# Altium PCB linkit-v4-1.1_6layers_smdonly.PcbDoc (part 5 of 5)
Units mm, origin at the board's own origin, x right, y up, seen from the top; angles counter-clockwise.
Board outline 70 x 35 mm, 6 copper layers (Top Layer, Int1 (GND), Int2 (Sign), Int3 (Sign), Int4 (PWR), Bottom Layer), stack 1.649 mm thick; 203 components, 154 nets, 694 pads, 939 vias.
Unrouted connection lines stored in the file: 1.
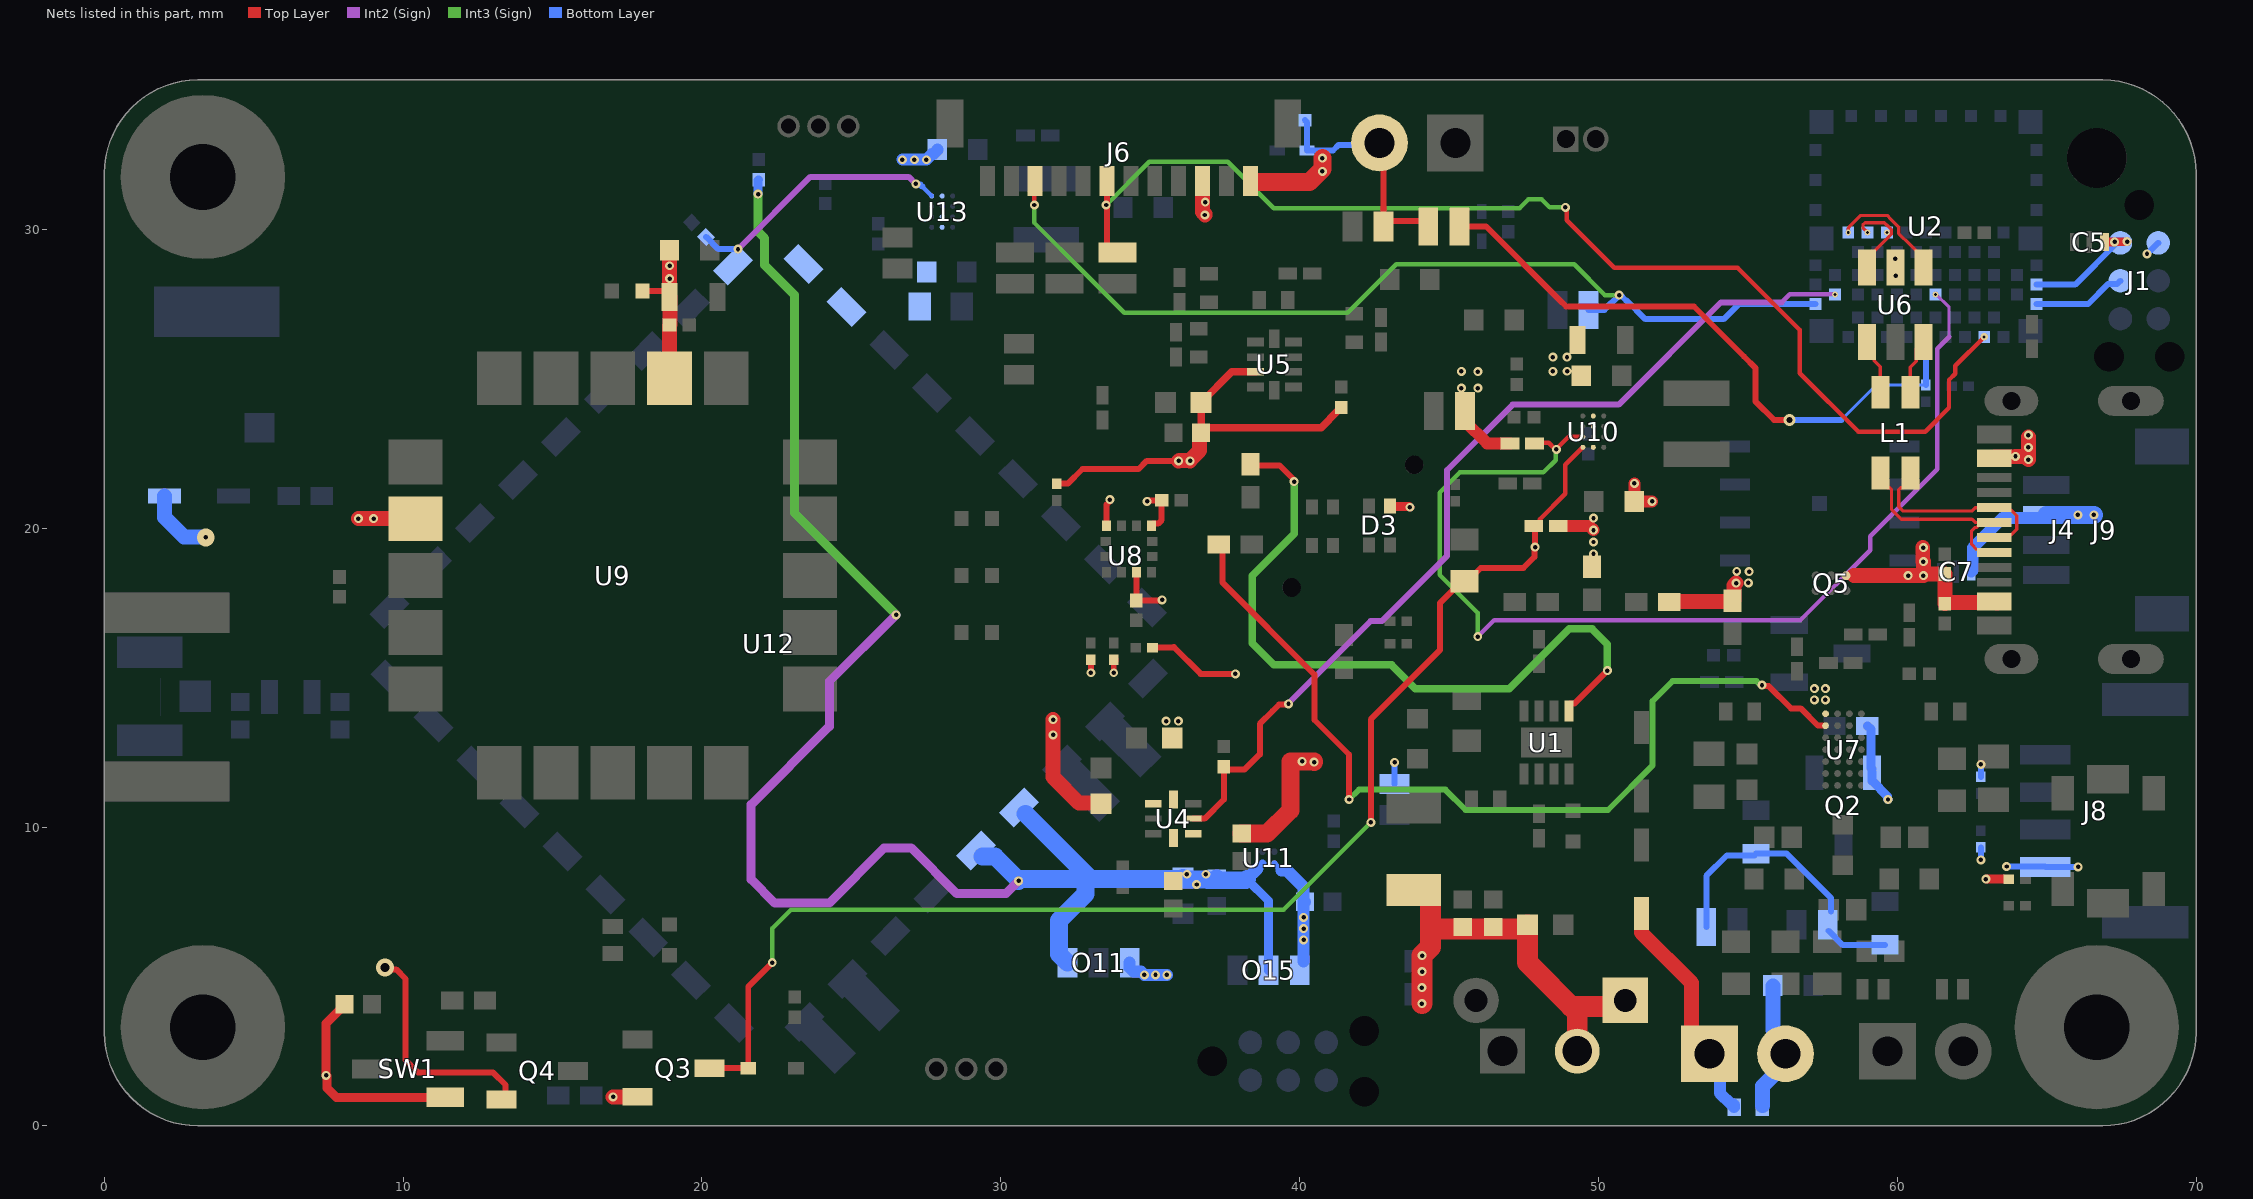
[diagram p8: the nets of this part, all layers, seen from the top]

## Via types
v1: diameter 0.3, hole 0.127, Int1 (GND) to Int3 (Sign), tented both sides, 148 vias
v2: diameter 0.4, hole 0.2, Int1 (GND) to Int2 (Sign), tented both sides, 103 vias
v3: diameter 0.3, hole 0.15, Top Layer to Int1 (GND), tented both sides, 99 vias
v4: diameter 0.4, hole 0.2, Int1 (GND) to Bottom Layer, tented both sides, 69 vias
v5: diameter 0.4, hole 0.2, Int1 (GND) to Int3 (Sign), tented both sides, 68 vias
v6: diameter 0.4, hole 0.2, Top Layer to Int1 (GND), tented both sides, 64 vias
v7: diameter 0.3, hole 0.15, Top Layer to Int4 (PWR), tented both sides, 63 vias
v8: diameter 0.3, hole 0.15, Top Layer to Int3 (Sign), tented both sides, 56 vias
v9: diameter 0.3, hole 0.15, Int1 (GND) to Bottom Layer, tented both sides, 46 vias
v10: diameter 0.4, hole 0.2, Top Layer to Bottom Layer, tented both sides, 34 vias
v11: diameter 0.3, hole 0.15, Int4 (PWR) to Bottom Layer, tented both sides, 18 vias
v12: diameter 0.3, hole 0.15, Top Layer to Int2 (Sign), tented both sides, 18 vias
v13: diameter 0.3, hole 0.15, Int3 (Sign) to Bottom Layer, tented both sides, 18 vias
v14: diameter 0.3, hole 0.15, Int2 (Sign) to Bottom Layer, tented both sides, 16 vias
v15: diameter 0.3, hole 0.15, Int1 (GND) to Int2 (Sign), tented both sides, 14 vias
v16: diameter 0.2, hole 0.1, Int3 (Sign) to Bottom Layer, tented both sides, 14 vias
v17: diameter 0.5, hole 0.2, Top Layer to Bottom Layer, tented both sides, 12 vias
v18: diameter 0.2, hole 0.1, Int2 (Sign) to Bottom Layer, tented both sides, 10 vias
v19: diameter 0.3, hole 0.15, Int2 (Sign) to Int3 (Sign), tented both sides, 9 vias
v20: diameter 0.6, hole 0.15, Int1 (GND) to Bottom Layer, tented both sides, 8 vias
v21: diameter 0.3, hole 0.15, Int1 (GND) to Int3 (Sign), tented both sides, 8 vias
v22: diameter 0.226, hole 0.1, Top Layer to Int3 (Sign), tented both sides, 6 vias
v23: diameter 0.3, hole 0.15, Top Layer to Bottom Layer, tented both sides, 5 vias
v24: diameter 0.25, hole 0.1, Int3 (Sign) to Bottom Layer, tented both sides, 5 vias
v25: diameter 0.25, hole 0.1, Int2 (Sign) to Bottom Layer, tented both sides, 5 vias
v26: diameter 0.25, hole 0.1, Top Layer to Bottom Layer, tented both sides, 5 vias
v27: diameter 0.2, hole 0.1, Top Layer to Bottom Layer, tented both sides, 3 vias
v28: diameter 0.6, hole 0.3, Top Layer to Bottom Layer, tented both sides, 3 vias
v29: diameter 0.6, hole 0.15, Int3 (Sign) to Bottom Layer, tented both sides, 2 vias
v30: diameter 0.25, hole 0.1, Int1 (GND) to Bottom Layer, tented both sides, 2 vias
v31: diameter 0.2, hole 0.1, Int1 (GND) to Bottom Layer, tented both sides, 2 vias
v32: diameter 0.4, hole 0.2, Int2 (Sign) to Bottom Layer, tented both sides, 1 vias
v33: diameter 0.4, hole 0.2, Top Layer to Int2 (Sign), tented both sides, 1 vias
v34: diameter 0.169, hole 0.1, Int3 (Sign) to Bottom Layer, tented both sides, 1 vias
v35: diameter 0.6, hole 0.15, Int4 (PWR) to Bottom Layer, tented both sides, 1 vias
v36: diameter 0.25, hole 0.1, Int2 (Sign) to Int3 (Sign), tented both sides, 1 vias
v37: diameter 0.169, hole 0.1, Top Layer to Int2 (Sign), tented both sides, 1 vias

## Nets (pads, with @x,y where several pads share a name; then routed paths per layer and width w, separated by ;. In a path a pad name is that pad's centre, name@x,y a point inside that pad or via, vN(x,y) a via of type N, cw(c..) or ccw(c..) an arc to the next point about the centre after c; other vN are vias at no path point) (continued)
SPI_MOSI: J6.7 O3.2 U2.34 | length 39.7
  Top Layer w0.15: v8(48.895,30.734) 48.938,30.691 48.938,30.309 50.527,28.72 54.656,28.72 56.742,26.634 56.742,25.745 56.742,25.189 58.702,23.229 60.933,23.229 61.731,24.027 61.731,24.96 61.942,25.171 61.942,25.431 v26(62.91,26.399)
  Top Layer w0.2: J6.7@33.554,31.623 33.554,30.815 33.554,29.453 33.784,29.223 O3.2@33.909,29.223
  Int3 (Sign) w0.15: v8(33.528,30.815) 34.97,32.257 37.593,32.257 39.139,30.711 47.362,30.711 47.66,31.009 48.098,31.009 48.373,30.734 v8(48.895,30.734)
SPI_NSS: J6.10 O1.2 U2.2 | length 31.7
  Top Layer w0.15: v8(31.128,30.815) 31.128,31.597 J6.10@31.154,31.623
  Int3 (Sign) w0.15: v8(31.128,30.815) 31.128,30.213 32.824,28.517 34.136,27.205 41.613,27.205 43.237,28.829 48.706,28.829 49.188,28.829 50.22,27.797 v13(50.694,27.797)
  Bottom Layer w0.2: O1.2@49.67,27.305 50.202,27.305 v13(50.694,27.797) ; v13@50.691,27.797 50.72,27.826 50.924,27.621 50.946,27.621 51.572,26.995 54.192,26.995 54.696,27.499 U2.2@57.26,27.499
SPV+: C56.1 D5.2 J15.1 | length 7.8
  Top Layer w0.5: D5.2@51.435,7.105 51.435,6.465 53.113,4.787 53.113,3.021 J15.1@53.721,2.413
  Bottom Layer w0.4: J15.1@53.721,2.413 54.067,2.067 54.067,1.097 54.439,0.725 54.514,0.725 54.539,0.7 C56.1@54.539,0.625
SPV-: C56.2 FB5.1 J15.2 | length 4.2
  Bottom Layer w0.5: C56.2@55.489,0.675 55.489,1.33 J15.2@56.261,2.101 ; FB5.1@55.84,4.674 55.84,3.213 56.261,2.792 J15.2@56.261,2.413
STAT_LED: R13.2 U1.5 | length 24.1
  Top Layer w0.2: R13.2@38.354,22.14 38.396,22.098 39.335,22.098 39.819,21.613 v8(39.819,21.559) ; U1.5@49.01,13.877 49.01,14.077 49.06,14.127 49.193,14.127 v8(50.298,15.232)
  Int3 (Sign) w0.254: v8(39.819,21.559) 39.819,19.819 38.413,18.413 38.413,16.151 39.139,15.425 43.075,15.425 43.868,14.632 47.017,14.632 49.022,16.637 49.784,16.637 50.298,16.123 v8(50.298,15.232)
SWDCLK: J1.4 U2.30 | length 3.1
  Bottom Layer w0.2: U2.30@64.66,27.499 66.383,27.499 67.048,28.164 67.354,28.164 J1.4@67.466,28.276
SWDIO: J1.2 U2.28 | length 3.4
  Bottom Layer w0.2: U2.28@64.66,28.149 65.953,28.149 67.351,29.546 J1.2@67.466,29.546
SWS: C3.2 O6.2 U2.40 | length 21
  Top Layer w0.2: O6.2@45.352,30.099 46.241,30.099 48.706,27.634 48.92,27.419 53.198,27.419 54.872,25.745 55.254,25.363 55.254,24.248 55.88,23.622 v10(56.388,23.622)
  Bottom Layer w0.1: 58.13,23.622 59.297,24.789 60.39,24.789 60.392,24.791 C3.2@60.96,24.791
  Bottom Layer w0.2: v10@56.416,23.622 58.13,23.622 ; C3.2@60.96,24.791 U2.40@60.96,26.399
SWS_IN: D8.1 J10.2 O6.1 O8.1 R60.1 | length 8.1
  Top Layer w0.2: J10.2@42.672,32.893 42.812,32.753 O8.1@42.812,30.281 ; O8.1@42.812,30.099 O8.1@42.812,30.243 ; O6.1@44.31,30.099 44.128,30.281 O8.1@42.812,30.281 ; O8.1@42.812,30.243 O8.1@42.812,30.281 ; O8.1@42.812,30.243 42.773,30.281 O8.1@42.812,30.281
  Bottom Layer w0.2: R60.1@40.177,33.655 40.251,33.581 D8.1@40.251,32.639 41.12,32.639 41.307,32.826 42.605,32.826 J10.2@42.672,32.893
USB_D_N: U2.10 U6.6 | length 3
  Top Layer w0.112: U6.6@58.985,28.728 59.229,28.972 59.229,29.273 59.794,29.838 59.794,29.996 59.691,30.099 ; v27(59.01,29.899) 58.851,30.058 58.851,30.15 58.927,30.226 59.563,30.226 59.69,30.099
USB_D_P: U2.8 U6.4 | length 3.9
  Top Layer w0.112: v27(58.36,29.899) 58.36,30.047 58.777,30.465 59.662,30.465 59.789,30.338 60.054,30.073 60.054,29.859 60.427,29.486 60.885,29.028 U6.4@60.885,28.728
USB_L_N: L1.3 U6.1 | length 1.9
  Top Layer w0.112: U6.1@58.985,26.228 59.229,25.984 59.229,25.745 59.229,25.607 59.436,25.4 L1.3@59.436,24.548
USB_L_P: L1.2 U6.3 | length 1.5
  Top Layer w0.112: L1.2@60.436,24.871 60.436,25.384 60.641,25.589 60.641,25.745 60.641,25.984 U6.3@60.885,26.228
USB_N: J4.A7 J4.B7 L1.4 | length 6.7
  Top Layer w0.112: L1.4@59.436,21.848 59.436,21.598 59.68,21.354 59.744,21.354 59.809,21.288 59.809,20.625 60.134,20.301 62.503,20.301 62.612,20.191 62.76,20.191 J4.A7@63.243,20.191 ; J4.A7@62.76,20.135 62.76,20.133 62.724,20.097 62.722,20.097 62.648,20.023 62.593,20.023 62.486,19.916 62.486,19.466 62.667,19.285 63.149,19.285 J4.B7@63.243,19.191
USB_P: J4.A6 J4.B6 L1.1 | length 7.4
  Top Layer w0.112: L1.1@60.436,21.848 60.436,21.598 60.192,21.354 60.113,21.354 60.048,21.288 60.048,20.724 60.198,20.574 62.495,20.574 62.612,20.691 J4.B6@63.243,20.691 ; 62.605,20.684 J4.B6@63.236,20.684 ; J4.A6@63.243,19.691 63.337,19.785 63.819,19.785 64,19.966 64,20.416 63.819,20.597 63.337,20.597 J4.B6@63.25,20.684
VADC_EN: R57.2 U2.3 U4.2 | length 31.7
  Top Layer w0.2: U4.2@36.449,10.279 36.822,10.279 37.465,10.922 37.465,11.928 R57.2@37.465,12.02 37.557,11.928 38.165,11.928 38.67,12.433 38.67,13.456 39.095,13.881 39.316,14.102 39.537,14.102 39.54,14.105 39.61,14.105 v12(39.63,14.124)
  Int2 (Sign) w0.15: 56.134,27.559 56.399,27.824 v18(57.91,27.824)
  Int2 (Sign) w0.2: v12(39.63,14.124) 39.63,14.146 42.374,16.891 42.755,16.891 44.941,19.077 44.941,21.949 47.129,24.137 50.68,24.137 54.102,27.559 56.134,27.559
VBAT: C1.1 C19.2 C20.1 C21.1 C22.1 C41.2 C48.2 C51.1 J5.2 J6.3 O9.1 O11.3 Q2.2 Q3.2 R4.1 R8.2 R9.2 R55.2 SW1.1 U10.A2 U13.A2 | length 33.4
  Top Layer w0.3: C1.1@8.049,4.047 8.042,4.047 7.899,3.904 7.899,3.897 7.43,3.428 v7(7.43,1.687) 7.449,1.668 7.449,1.275 7.769,0.955 SW1.1@11.41,0.955
  Top Layer w0.4: O9.1@45.533,23.583 46.279,22.837 R9.2@47.064,22.837 ; R8.2@48.66,20.066 49.708,20.066 v7(49.835,19.939) ; C48.2@51.184,20.75 51.2,20.766 C48.2@51.2,20.9 ; v3(51.2,21.5) C48.2@51.2,20.9 ; v3(51.8,20.9) C48.2@51.2,20.9
  Top Layer w0.5: v7(17.031,0.971) Q3.2@17.968,0.971 ; J6.3@36.754,31.623 36.754,30.583 36.83,30.507 v7(36.83,30.48)
  Top Layer w0.7: C19.2@43.815,7.891 44.19,7.891 44.375,7.706 44.375,7.296 44.375,6.593 ; v7(44.095,4.094) 44.093,4.626 v7(44.096,4.629) ; v7@44.093,4.755 44.093,5.158 44.1,5.165 v7(44.1,5.7) 44.382,5.982 44.382,6.593 ; 44.524,6.593 47.487,6.593 C22.1@47.625,6.731 47.625,5.461 49.292,3.794 J5.2@49.292,2.501 ; 49.086,4 50.7,4 C51.1@50.9,4.2
  Bottom Layer w0.3: R4.1@59,13.388 59.123,13.265 59.123,11.973 Q2.2@59.156,11.94 ; Q2.2@59.156,11.821 59.156,11.546 59.68,11.022 59.68,10.932 v11(59.69,10.922)
  Bottom Layer w0.4: v11@26.709,32.332 v11@27.51,32.332 ; v11(27.51,32.329) 27.705,32.523 27.754,32.523 27.879,32.648 C41.2@27.879,32.673 ; O11.3@34.315,5.461 34.315,5.291 34.446,5.161 34.696,5.161 v11(34.804,5.053) v11(35.56,5.053)
  other v7: 44.098,5.165 49.835,19.137 49.835,19.538 49.835,20.34 45.413,24.684 45.965,24.684 45.417,25.248 45.965,25.236 36.844,30.909
  other v11: 35.179,5.051 26.709,32.329 27.11,32.329
VBAT_SENSE: O5.1 O7.1 R5.2 R6.2 | length 9.3
  Bottom Layer w0.2: O5.1@53.611,6.657 53.611,8.365 54.295,9.049 55.217,9.049 R6.2@55.275,9.107 56.298,9.107 57.785,7.62 O7.1@57.785,7.168 ; O7.1@57.702,6.53 58.181,6.051 R5.2@59.585,6.051
VBUS: C17.2 C18.2 J4.A4_B9 J4.B4_A9 Q5.A1 R35.1 R52.2 U2.12 U6.5 U7.G4 | length 11.5
  Top Layer w0.4: v3(59.936,29.017) 59.936,28.964 U6.5@59.944,28.956 ; J4.A4_B9@63.21,17.508 J4.A4_B9@63.243,17.541
  Top Layer w0.5: R52.2@52.366,17.526 52.387,17.547 R35.1@54.462,17.547 ; R35.1@54.483,17.568 R35.1@54.462,17.547 ; v7(54.61,18.161) 54.533,18.084 54.533,17.618 R35.1@54.462,17.547 ; 58.547,18.412 58.55,18.415 v7(60.364,18.415) ; v7@60.365,18.416 v7(60.871,18.415) ; v7@60.852,19.353 60.852,18.884 v7(60.871,18.884) v7@60.871,18.443 ; v7(60.871,18.415) 60.922,18.466 C18.2@61.595,18.466 C17.2@61.595,17.475 ; C17.2@61.628,17.508 J4.A4_B9@63.21,17.508 ; J4.B4_A9@63.243,22.341 63.293,22.391 63.942,22.391 v7(63.957,22.405) 64.281,22.405 v7(64.389,22.297) v7@64.389,23.047 ; J4.A4_B9@63.279,17.555 J4.A4_B9@63.342,17.491
  other v3: 59.944,28.448
  other v7: 57.224,14.258 57.595,14.258 57.224,14.629 57.595,14.629 55.015,18.171 54.629,18.554 55.04,18.548 60.871,19.353 64.389,22.706 64.389,23.114
  other v31: 59.66,29.899
VCC_SEL: R9.1 U2.52 U10.B3 | length 36.1
  Top Layer w0.15: R9.1@47.864,22.837 47.882,22.855 48.339,22.855 48.558,22.636 v8(48.596,22.636) 48.596,22.655 48.999,23.058 U10.B3@49.461,23.058
  Int2 (Sign) w0.1: v18@61.308,27.824 61.737,27.395 61.737,26.403
  Int2 (Sign) w0.15: v19(45.962,16.374) 46.515,16.928 56.762,16.928 59.097,19.262 59.097,19.727 61.341,21.971 61.341,25.745 61.341,26.006 61.737,26.403 ; v18(61.285,27.824) v18@61.308,27.824
  Int3 (Sign) w0.15: v19(45.962,16.374) 45.962,17.163 44.683,18.442 44.683,20.228 44.683,20.666 44.683,21.188 45.368,21.873 48.162,21.873 48.567,22.278 48.567,22.607 v8(48.596,22.636)
"VOUT_TPS63901 3V3&2V32": C50.2 C61.1 U12.7 U12.8 U13.C2 U13.D2
VPA_EN: R67.2 U12.9 U13.A3 | length 9
  Int2 (Sign) w0.2: v14(21.209,29.337) 23.63,31.758 26.919,31.758 v14(27.158,31.518)
  Bottom Layer w0.15: 27.379,31.431 U13.A3@27.691,31.119
  Bottom Layer w0.2: R67.2@20.143,29.747 20.553,29.337 v14(21.209,29.337) ; v14(27.158,31.518) 27.178,31.499 27.311,31.499 27.379,31.431
VSENS_1: C8.1 C12.2 C13.1 C37.2 C38.2 R28.1 R54.2 R56.2 U4.4 U5.8 U8.3 U8.7 U8.10 | length 21.7
  Top Layer w0.2: R54.2@31.877,21.489 32.245,21.489 32.737,21.981 34.618,21.981 34.887,22.251 v7(35.956,22.251) ; U8.10@33.54,20.079 33.54,20.786 33.655,20.901 v7(33.655,20.955) ; U8.3@34.54,18.529 34.54,17.586 C38.2@34.537,17.582 34.538,17.581 35.354,17.581 35.373,17.6 v7(35.4,17.6) ; v7(34.9,20.9) 34.919,20.919 35.362,20.919 C37.2@35.385,20.942 35.385,20.271 35.268,20.154 35.09,20.154 35.04,20.104 U8.7@35.04,20.079 ; R56.2@35.078,16.002 35.76,16.002 35.787,16.029 ; 35.791,16.025 36.69,15.126 v7(37.849,15.126) ; C12.2@36.703,23.189 C12.2@36.705,23.191 ; R28.1@41.282,23.924 41.292,23.924 41.402,24.034 R28.1@41.402,24.044
  Top Layer w0.25: C12.2@36.705,23.191 C12.2@36.705,23.193 ; U5.8@38.521,25.228 37.726,25.228 C13.1@36.705,24.207 C12.2@36.705,23.193 ; R28.1@41.282,23.924 40.726,23.368 36.88,23.368 C12.2@36.705,23.193
  Top Layer w0.5: v7(35.956,22.251) 35.975,22.27 v7@36.331,22.27 ; v7(36.339,22.251) 36.339,22.262 v7@36.331,22.27 ; C12.2@36.703,23.189 36.655,23.141 36.655,22.594 v7@36.331,22.27
  other v7: 35.536,13.544 35.944,13.544
VSENS_2: C10.1 C39.1 C52.2 C53.2 D4.2 R48.1 U4.5 U9.2 U9.17 | length 14.4
  Top Layer w0.2: R48.1@18.013,27.94 18.748,27.94 18.81,27.878 18.81,26.91 18.913,26.807 C39.1@18.933,26.807
  Top Layer w0.5: v7(8.509,20.32) 10.413,20.32 U9.2@10.418,20.315 ; C53.2@18.918,29.3 v7(18.918,28.782) v7(18.918,28.35) 18.918,27.94 C52.2@18.918,27.74 18.931,27.727 C39.1@18.931,26.809 ; U9.17@18.922,25.019 C39.1@18.922,26.774 ; v7(31.75,13.596) v7(31.75,13.081) 31.75,11.673 32.622,10.801 33.339,10.801 C10.1@33.361,10.779
  Bottom Layer w0.5: D4.2@2.023,21.074 2.023,20.36 2.671,19.712 3.38,19.712 v35(3.399,19.693)
  other v7: 9.017,20.32
VSYS: C5.1 C7.1 C9.2 C11.2 C42.2 C45.2 C55.1 D3.1 J1.1 J6.1 J8.4 J9.2 O14.1 O15.3 Q4.2 R1.2 R2.2 R16.2 R61.2 R62.1 U4.1 U4.8 U10.C2 U10.D2 U11.A2 | length 31.9
  Top Layer w0.2: v28(9.39,5.306) 9.459,5.238 9.77,5.238 10.091,4.917 10.091,2.197 10.496,1.792 13.009,1.792 13.428,1.373 13.428,0.903 Q4.2@13.441,0.89 ; v7(33.02,15.163) R1.2@33.02,15.595 ; R2.2@33.772,15.571 33.782,15.561 v7(33.782,15.163) ; v7(67.273,29.579) v7@67.279,29.585 ; v7@67.685,29.585 v7(67.691,29.591)
  Top Layer w0.252: R2.2@33.772,15.571 33.772,15.585 R2.2@33.782,15.595 ; R16.2@63.554,8.255 R16.2@63.728,8.255
  Top Layer w0.3: R2.2@33.772,15.572 R2.2@33.788,15.589 ; D3.1@43.022,20.742 43.043,20.721 43.668,20.721 v7(43.688,20.701) ; v7@63.007,8.255 R16.2@63.554,8.255 ; C5.1@66.929,29.576 66.929,29.579 v7(67.273,29.579) ; v7@67.279,29.585 v7@67.685,29.585
  Top Layer w0.6: C9.2@38.06,9.779 38.913,9.779 39.691,10.557 39.691,12.199 v7(40.087,12.199) 40.491,12.199 v7(40.491,12.175) ; J6.1@38.404,31.582 40.334,31.582 40.767,32.015 v7(40.767,32.385)
  Bottom Layer w0.2: U11.A2@39.154,8.775 39.161,8.775 39.39,8.546 ; 39.58,8.475 39.58,8.546 ; v11@40.132,6.196 v11(40.132,6.223) ; O14.1@43.18,11.443 43.182,11.444 v11(43.182,12.164) ; v11(62.8,8.9) R62.1@62.8,9.32 ; R61.2@62.8,11.68 v11(62.8,12.1) ; v11(63.66,8.68) 64.939,8.68 J8.4@64.952,8.666 v11(66.055,8.666) ; v11(68.356,29.18) 68.363,29.18 68.729,29.546 J1.1@68.736,29.546
  Bottom Layer w0.4: 39.39,8.546 39.58,8.546 40.132,7.994 40.132,7.541 C45.2@40.18,7.493 40.132,7.445 v11(40.132,6.979) v11(40.132,6.604) v11(40.132,6.223) ; O15.3@40.132,5.5 v11@40.132,6.196 ; C7.1@62.476,18.542 62.526,18.592 62.526,19.346 63.519,20.339 64.887,20.339 J9.2@64.987,20.439
  Bottom Layer w0.6: J9.2@64.987,20.439 v11@66.579,20.439
  other v7: 36.558,8.077 62.962,8.255 36.227,8.421 36.862,8.421 48.477,25.248 48.952,25.251 48.473,25.724 48.949,25.727 40.767,31.943
  other v11: 66.04,20.447 66.579,20.442
VSYS_EN: C44.1 D1.1 Q3.3 R8.1 U10.A3 | length 44.4
  Top Layer w0.15: R8.1@47.86,20.066 47.885,20.066 48.035,20.216 48.035,20.292 48.895,21.152 48.895,22.124 U10.A3@49.478,22.707
  Top Layer w0.2: Q3.3@20.1,1.93 D1.1@21.552,1.93 21.552,4.662 v8(22.355,5.465) ; v8(42.383,10.155) 42.383,13.606 44.696,15.919 44.696,17.492 45.427,18.223 45.617,18.223 46.063,18.669 47.49,18.669 47.862,19.04 47.862,19.351 v12(47.881,19.37) 47.87,19.381 47.87,20.056 R8.1@47.86,20.066
  Int3 (Sign) w0.15: v8(22.355,5.465) 22.355,6.607 22.987,7.239 39.467,7.239 v8(42.383,10.155)
VSYS_SMD: C46.1 C59.2 O11.1 O15.2 R66.2 U11.A1 U12.31 U12.32 | length 57.8
  Int2 (Sign) w0.3: v19(26.5,17.1) 24.27,14.87 24.27,13.37 21.649,10.749 21.649,8.251 22.443,7.457 24.257,7.457 26.1,9.3 27,9.3 28.53,7.77 30.17,7.77 v14(30.6,8.2)
  Int3 (Sign) w0.3: v13(21.88,31.181) 21.88,29.92 22.1,29.7 22.1,28.8 23.1,27.8 23.1,20.5 v19(26.5,17.1)
  Bottom Layer w0.264: 38.591,8.612 U11.A1@38.754,8.775
  Bottom Layer w0.3: v13(21.88,31.181) 21.88,31.64 R66.2@21.9,31.66 ; 38.234,8.255 38.964,7.525 O15.2@38.964,5.207
  Bottom Layer w0.4: 38.234,8.255 38.591,8.612
  Bottom Layer w0.6: U12.31@29.391,9.009 29.816,9.009 v14@30.569,8.255 ; v14(30.6,8.2) 30.6,8.224 v14@30.569,8.255 ; U12.32@30.828,10.445 32.837,8.437 33.019,8.255 36.057,8.255 C46.1@36.1,8.298 36.15,8.248 36.894,8.248 36.921,8.22 37.163,8.22 37.219,8.276 C59.2@37.229,8.276 37.285,8.22 38.199,8.22 38.234,8.255 ; O11.1@32.233,5.461 31.95,5.744 31.95,6.869 32.837,7.756 32.837,8.255 v14@30.569,8.255
WIRELESS_NCHG_LED: R14.1 U7.F4 | length 30.4
  Top Layer w0.2: R14.1@37.296,19.457 37.414,19.339 37.414,18.186 40.5,15.1 40.5,13.582 41.656,12.426 v8(41.656,10.922) ; v8(55.474,14.751) 55.512,14.713 55.7,14.713 56.443,13.97 56.769,13.97 57.347,13.392 U7.F4@57.601,13.392
  Int3 (Sign) w0.2: v8(41.656,10.922) 41.987,11.253 44.877,11.253 45.559,10.572 50.323,10.572 51.816,12.065 51.816,14.219 52.482,14.885 55.286,14.885 55.419,14.751 v8(55.474,14.751)
pads on no net: J1.H1 J1.H2 J1.H3 J4.A8 J4.B8 J9.S1 J9.S2 J12.H1 J12.H2 J12.H3 MEC1.1 MEC1.2 MH1.0 Q5.B1 Q5.B2 U2.15 U2.41 U2.59 U2.65 U2.66 U2.67 U2.68 U2.69 U2.70 U2.71 U2.72 U2.73 U2.74 U2.75 U2.76 U2.77 U2.78 U8. U8.4 U8.11 U12.11 U12.12

## Polygon pours and split planes (outlines as drawn)
GND on Bottom Layer "Bottom Layer-GND" (solid, pour order 7): 9.64,16.115 9.807,16.004 10.655,15.155 10.767,14.988 10.806,14.791 10.767,14.594 10.655,14.427 9.807,13.578 9.64,13.467 9.445,13.428 9.403,13.411 9.349,13.388 9.264,13.371 9.179,13.354 9.128,13.354 9.078,13.344 7.51,13.344 7.444,13.3 7.247,13.261 6.677,13.261 6.48,13.3 6.313,13.412 6.201,13.579 6.162,13.776 6.162,14.926 6.201,15.123 6.313,15.29 6.48,15.402 6.677,15.441 7.247,15.441 7.444,15.402 7.611,15.29 7.63,15.262 8.337,15.262 9.079,16.004 9.246,16.115 9.443,16.155
GND on Bottom Layer "Bottom Layer-GND 1" (solid, pour order 8): 6.014,15.402 6.181,15.29 6.293,15.123 6.332,14.926 6.332,13.776 6.293,13.579 6.181,13.412 6.014,13.3 5.817,13.261 5.247,13.261 5.05,13.3 4.893,13.405 4.325,13.405 4.284,13.378 4.087,13.339 3.585,13.339 3.574,13.337 2.524,13.337 2.327,13.376 2.16,13.488 2.048,13.655 2.009,13.852 2.009,14.902 2.048,15.099 2.16,15.266 2.327,15.378 2.524,15.417 3.443,15.417 3.447,15.418 4.087,15.418 4.284,15.379 4.368,15.323 4.931,15.323 5.05,15.402 5.247,15.441 5.817,15.441
GND on Bottom Layer "BOTGND" (solid, remove dead copper, pour order 4): 0,33.113 0,1.778 1.905,-0.127 67.945,-0.127 70.104,1.905 70,33.224 68.58,34.874 1.454,34.874
GND on Int3 (Sign) "L3_GND" (solid, remove dead copper, pour order 3): 0,33.098 0,1.655 1.882,0 68.072,0 70,2.032 70,33.191 68.487,35.001 1.767,35
GND on Int2 (Sign) "L2_GND" (solid, remove dead copper, pour order 2): 0.001,33.009 -0.108,1.924 1.817,0 68.072,0 70,2.113 70,33.332 68.326,35.052 1.723,35.001
GND on Top Layer "TOPGND" (solid, remove dead copper, pour order 0): 0,2.032 1.651,0 68.143,0 70,1.858 70,33.142 68.081,35.061 1.506,35 0,33.274
VSYS on Int4 (PWR) (split plane): 240 vertices, not listed, extent 0.509,0.509 69.491,34.491
VSENS_2 on Int4 (PWR) (split plane): 32.383,17.37 32.383,12.983 32.174,12.775 31.072,12.775 30.174,13.673 30.174,16.628 30.167,16.68 30.147,16.729 30.115,16.771 19.438,27.448 19.396,27.48 19.347,27.5 19.295,27.507 17.907,27.507 17.855,27.5 17.806,27.48 17.764,27.448 10.398,20.082 9.977,19.661 9.381,19.661 9.328,19.654 9.28,19.634 9.238,19.601 8.888,19.252 0.51,19.252 0.51,21.561 0.719,21.769 8.89,21.769 8.942,21.776 8.991,21.796 9.033,21.828 16.975,29.77 19.982,29.77
VBAT on Int4 (PWR) (split plane): 29.921,31.395 29.935,31.378 29.953,31.353 29.972,31.339 29.995,31.321 30.023,31.31 30.044,31.301 30.073,31.297 30.096,31.294 38.524,31.294 43.727,26.092 43.769,26.06 43.817,26.04 43.87,26.033 45.945,26.033 49.455,22.522 49.455,21.717 49.455,21.665 49.462,21.613 49.482,21.564 49.514,21.522 50.682,20.354 50.682,15.324 50.682,12.149 50.682,10.414 50.689,10.362 50.709,10.313 50.741,10.271 50.783,10.239 50.832,10.219 50.884,10.212 57.15,10.212 57.202,10.219 57.251,10.239 57.293,10.271 58.377,11.355 60.504,11.355 60.504,10.922 60.504,9.482 58.258,7.235 49.705,7.235 49.653,7.228 49.605,7.208 49.563,7.176 45.831,3.445 45.799,3.403 45.779,3.354 45.772,3.302 45.772,0.511 6.933,0.511 6.933,2.71 7.463,3.24 9.686,3.24 9.738,3.247 9.787,3.267 9.829,3.299 11.916,5.386 31.115,5.386 31.167,5.393 31.216,5.413 31.22,5.417 40.543,5.417 40.596,5.424 40.644,5.444 40.686,5.476 46.117,10.906 46.149,10.948 46.169,10.997 46.176,11.049 46.176,13.886 47.641,15.351 48.086,15.797 48.118,15.839 48.139,15.888 48.146,15.94 48.146,18.956 48.139,19.008 48.127,19.037 48.118,19.057 48.105,19.075 48.086,19.099 45.541,21.645 45.541,22.225 45.534,22.277 45.514,22.326 45.482,22.368 44.339,23.511 44.297,23.543 44.248,23.563 44.196,23.57 42.816,23.57 37.543,28.843 37.501,28.875 37.452,28.895 37.4,28.902 27.484,28.902 26.302,30.084 26.302,32.2 26.302,32.249 26.751,32.698 28.618,32.698
VSENS_1 on Int4 (PWR) (split plane): 37.957,21.574 38.66,20.871 38.66,15.656 38.66,14.562 37.989,13.89 37.957,13.859 37.925,13.817 37.905,13.768 37.898,13.716 37.898,12.584 37.416,12.102 36.184,12.102 35.076,13.209 35.076,13.827 35.994,14.744 36.001,14.747 36.043,14.779 36.075,14.821 36.095,14.87 36.102,14.922 36.102,15.844 36.095,15.896 36.075,15.944 36.043,15.986 34.973,17.056 34.973,18.759 34.966,18.811 34.946,18.86 34.914,18.902 33.002,20.814 33.002,22.912 36.619,22.912
VBUS on Int4 (PWR) (split plane): 64.949,23.538 64.949,21.166 60.07,16.286 57.574,13.791 56.853,13.791 54.177,16.467 54.177,18.948 59.406,18.948 59.458,18.954 59.507,18.975 59.549,19.007 64.216,23.674 64.813,23.674
GND on Int1 (GND) (split plane): 151 vertices, not listed, extent 0.509,0.509 69.491,34.491
PGND1 on Int1 (GND) (split plane): 33.298,34.49 33.298,33.084 32.816,32.602 31.3,32.602 31.248,32.595 31.199,32.575 31.157,32.543 29.932,31.317 29.9,31.275 29.88,31.227 29.873,31.174 29.873,27.858 29.394,27.38 26.119,27.38 24.84,28.659 24.84,29.634 25.571,30.366 25.603,30.408 25.624,30.457 25.63,30.509 25.63,31.029 29.091,34.49
PGND1 on Int1 (GND) (split plane): 48.498,27.289 48.54,27.257 48.589,27.237 48.641,27.23 51.097,27.23 52.122,26.205 52.122,25.608 51.757,25.243 51.725,25.201 51.705,25.152 51.698,25.1 51.698,22.427 51.705,22.375 51.725,22.326 51.757,22.284 52.122,21.919 52.122,20.658 51.763,20.298 47.17,20.298 46.247,21.221 46.247,26.912 47.201,27.865 47.922,27.865
AGND on Int1 (GND) (split plane): 42.814,29.037 42.814,27.859 41.191,26.237 37.049,26.237 35.762,27.524 35.762,28.872 36.406,29.516 42.334,29.516
VBUS on Int1 (GND) (split plane): 60.13,30.095 60.123,30.043 60.123,29.555 60.13,29.503 60.15,29.454 60.182,29.412 60.377,29.217 60.377,28.448 60.377,25.897 60.384,25.845 60.404,25.796 60.436,25.754 62.723,23.467 62.765,23.435 62.814,23.415 62.866,23.408 64.753,23.408 65.053,23.108 65.053,21.841 63.062,21.841 59.13,25.773 59.13,29.623 59.123,29.675 59.103,29.724 59.071,29.765 59.03,29.797 59.03,30.099 60.132,30.099

## Other copper
Top Layer:
  rectangle net VSYS: 36.035,7.898 37.105,8.584
  rectangle net VBUS: 54.438,18.012 55.189,18.703
  region net GND: 57.938,13.857 58.089,14.008 58.089,14.672 58.149,14.732 58.877,14.732 58.877,14.357 58.486,13.966 58.45,13.832 58.402,13.751 58.402,13.792 58.204,13.892 58.024,13.787
  region net VSYS: 35.773,9.681 35.773,9.532 35.923,9.381 35.923,8.699 36.073,8.549 36.073,8.13 35.474,8.13 35.474,8.558 35.623,8.707 35.623,9.689
  region net VSENS_1: 35.778,10.88 35.778,11.03 35.627,11.18 35.627,11.863 35.395,12.095 35.395,12.827 35.395,13.753 36.085,13.753 36.085,12.647 36.085,12.012 35.927,11.855 35.923,10.873
  region net VSENS_2: 35.099,10.779 34.837,11.041 34.377,11.041 34.29,11.128 33.419,11.128 33.419,10.7 33.69,10.429 34.146,10.429 34.405,10.688 34.957,10.688
  region net VSYS: 36.455,9.78 36.581,9.654 37.041,9.654 37.214,9.481 38.136,9.481 38.136,9.859 37.916,10.078 37.197,10.078 37.023,9.904 36.65,9.904
  pour cut-out: 46.863,24.765 46.848,24.75 46.848,23.542 49.699,23.542 49.655,24.765
  pour cut-out: 58.551,18.875 56.999,18.875 56.999,17.464 58.531,17.464
  pour cut-out: 59.759,14.039 59.781,14.017 59.781,11.669 56.769,11.669 56.769,14.017
  region net NetC58_1: 46.468,11.237 47.421,12.115 47.575,12.115 47.633,11.443 46.906,10.593 46.455,10.593
  pour cut-out: 54.582,23.895 52.337,23.895 52.337,23.232 52.474,23.095 54.582,23.095
  region net VSYS: 49.911,23.4 49.911,23.801 49.911,24.205 50.074,24.368 50.074,25.29 49.6,25.676 49.6,26.774 49.026,26.774 49.026,25.982 48.235,25.982 48.235,25.01 49.05,24.788 49.167,24.754 49.455,24.501 49.746,24.211 49.746,23.4
  region net PGND4: 47.777,13.325 47.776,13.326 46.121,13.326 45.97,13.175 46.023,13.123 46.023,12.546 46.028,12.546 46.244,12.331 47.724,12.331
  region net NetC2_2: 47.498,13.589 47.169,13.918 45.793,13.918 45.793,14.17 45.909,14.608 47.388,14.608 47.631,14.365 47.631,13.709
  region net NetC23_1: 57.514,11.702 57.988,11.702 58.001,11.896 57.58,11.896 56.854,11.896 56.388,11.43 56.388,7.747 57.377,6.902 57.785,6.985 57.514,7.469 57.023,7.874 57.023,11.176 57.111,11.442 57.331,11.662
  region net VBAT: 45.402,24.319 45.212,24.55 45.212,25.4 46.162,25.4 46.162,24.625 45.855,24.319
  region net "LX2_TPS63901 3V3&2V31": 50.178,23.836 50.678,24.178 51.689,24.511 52.196,24.929 52.447,24.929 52.592,24.201 51.245,23.727 50.808,23.707 50.178,23.678
  pour cut-out: 51.943,30.099 51.943,35.306 69.85,35.306 69.85,30.226 69.977,30.099
  region net COIL-2: 58.867,11.703 58.405,11.709 58.396,11.903 58.822,11.903 59.548,11.903 60.014,11.436 60.014,7.753 58.895,6.9 58.617,6.991 58.822,7.5 59.379,7.88 59.379,11.182 59.291,11.448 59.071,11.668
  region net "LX1_TPS63901 3V3&2V31": 50.177,22.632 50.658,22.309 51.741,22.19 52.201,22.068 52.502,22.085 52.62,22.89 51.98,22.894 51.279,22.828 51.056,22.791 50.397,22.791 50.177,22.791
  region net VBAT: 49.747,22.71 49.745,22.707 49.745,22.258 49.454,21.967 49.454,18.711 50.202,18.711 50.202,21.963 49.912,22.254 49.912,22.705
  region net VBUS: 57.513,13.775 57.066,14.222 57.066,14.792 57.823,14.792 57.823,14.075 57.694,13.946 57.694,13.768
  region net VBUS: 58.557,18.661 58.312,18.661 58.166,18.506 58.142,18.393 58.144,18.393 58.241,18.268 58.453,18.167 58.537,18.163
  region net RX-OUT: 58.805,12.496 58.802,12.493 56.062,12.493 55.672,12.102 54.703,12.102 54.703,12.182 55.314,12.793 56.803,12.793 56.905,12.691 58.809,12.691 58.801,12.682 58.801,12.592
  region net PGND3: 57.705,11.441 58.891,11.441 58.891,10.068 58.459,9.636 57.951,9.636 57.51,10.076 57.51,11.364
Int2 (Sign):
  pour cut-out: -0.013,15.334 0.003,15.319 2.67,15.319 2.879,15.109 2.883,15.113 4.191,15.113 4.191,15.087 4.271,15.007 5.101,15.007 5.224,15.13 7.446,15.13 7.446,14.958 7.463,14.94 8.471,14.94 9.441,15.911 10.574,14.779 10.574,14.769 10.539,14.769 9.454,13.684 9.407,13.731 9.329,13.731 9.265,13.666 7.394,13.666 7.301,13.574 7.296,13.579 5.02,13.579 4.878,13.721 4.831,13.674 0.001,13.674
  pour cut-out: 51.943,30.099 51.943,35.306 69.85,35.306 69.85,30.226 69.977,30.099
Int3 (Sign):
  pour cut-out: -0.027,15.332 -0.011,15.316 2.655,15.316 2.865,15.106 2.868,15.11 4.177,15.11 4.177,15.084 4.256,15.005 5.087,15.005 5.209,15.127 7.431,15.127 7.431,14.955 7.449,14.938 8.456,14.938 9.427,15.908 10.559,14.776 10.559,14.766 10.524,14.766 9.439,13.681 9.392,13.728 9.315,13.728 9.25,13.664 7.379,13.664 7.287,13.571 7.282,13.576 5.005,13.576 4.863,13.718 4.816,13.671 -0.014,13.671
  region net NetC23_1: 54.86,6.815 54.502,6.457 53.054,7.941 53.518,8.169
  pour cut-out: 51.943,30.099 51.943,35.306 69.85,35.306 69.85,30.226 69.977,30.099
Bottom Layer:
  rectangle net NetC49_2: 3.447,13.854 4.087,14.903
  pour cut-out: 32.827,31.072 32.827,30.272 29.163,30.272 28.994,30.441 29.2,30.647 29.2,31.2
  region net "VOUT_TPS63901 3V3&2V32": 25.098,27.402 25.382,27.783 25.568,27.681 26.933,26.934 27.28,27.681 27.836,28.238 27.836,29.142 28.105,29.455 28.125,30.07 28.122,30.427 27.96,30.427 27.953,30.064 27.936,29.921 27.805,29.776 26.479,28.513 24.847,28.513 24.524,28.19
  pour cut-out: 6.477,15.126 6.476,15.125 5.817,15.125 5.817,13.577 5.818,13.576 6.477,13.576
  pour cut-out: 5.893,15.11 5.958,15.067 6.001,15.002 6.016,14.926 6.016,13.776 6.001,13.7 5.958,13.635 5.893,13.592 5.817,13.577 5.247,13.577 5.171,13.592 5.106,13.635 5.063,13.7 5.059,13.722 4.233,13.722 4.228,13.714 4.163,13.671 4.087,13.655 3.585,13.655 3.574,13.653 2.524,13.653 2.448,13.668 2.383,13.711 2.34,13.776 2.325,13.852 2.325,14.902 2.34,14.978 2.383,15.043 2.448,15.086 2.524,15.101 3.443,15.101 3.447,15.102 4.087,15.102 4.163,15.086 4.228,15.043 4.253,15.006 5.066,15.006 5.106,15.067 5.171,15.11 5.247,15.125 5.817,15.125
  pour cut-out: 9.519,15.823 9.583,15.78 10.432,14.932 10.475,14.867 10.49,14.791 10.475,14.715 10.432,14.65 9.583,13.802 9.519,13.759 9.443,13.744 9.396,13.753 9.359,13.728 9.287,13.698 9.117,13.664 9.098,13.664 9.078,13.661 7.404,13.661 7.388,13.635 7.323,13.592 7.247,13.577 6.677,13.577 6.601,13.592 6.536,13.635 6.493,13.7 6.478,13.776 6.478,14.926 6.493,15.002 6.536,15.067 6.601,15.11 6.677,15.125 7.247,15.125 7.323,15.11 7.388,15.067 7.431,15.002 7.442,14.945 8.468,14.945 9.302,15.78 9.367,15.823 9.443,15.838
  region net "LX1_TPS63901 3V3&2V32": 28.387,31.04 28.49,31.06 30.634,31.297 30.634,31.944 30.462,32.116 30.287,32.116 29.806,31.826 28.865,31.7 28.331,31.166
  region net "LX2_TPS63901 3V3&2V32": 28.419,30.131 28.522,30.111 30.494,30.07 30.465,29.221 30.018,29.225 29.616,29.41 28.927,29.519 28.363,30.006
  region net "VOUT_TPS63901 3V3&2V32": 23.241,29.21 24.765,27.686 25.146,28.067 23.749,29.464 23.495,29.464
  region net VBAT: 27.984,31.083 27.904,31.256 27.889,31.307 27.813,31.496 27.775,31.577 27.775,31.913 27.51,32.177 27.51,32.48 28.214,32.48 28.252,32.442 28.252,31.539 28.13,31.288 28.122,31.123
  pour cut-out: 6.707,13.576 6.247,13.576 6.247,15.126 6.707,15.126
  pour cut-out: 2.54,15.367 2.54,13.335 0.508,13.335 0.508,15.367
  pour cut-out: 51.943,30.099 51.943,35.306 69.85,35.306 69.85,30.226 69.977,30.099
  pour cut-out: 57.46,26.472 64.587,26.472 64.587,29.572 64.46,29.699 57.46,29.699
Int1 (GND) (plane layer: these items are gaps in the copper):
  pour cut-out: 51.943,30.099 51.943,35.306 69.85,35.306 69.85,30.226 69.977,30.099
  lines w0.2: 58.928,29.623 58.928,30.48 59.055,30.607 59.309,30.607 60.579,30.607 60.579,30.297 60.325,30.043
  lines w0.4: 58.928,29.623 58.928,25.689 62.978,21.639 65.255,21.639 65.255,23.192 64.837,23.61 62.866,23.61 60.579,25.897 60.579,28.448 60.579,29.301 60.325,29.555 60.325,30.043 ; 24.638,28.575 26.035,27.178 29.478,27.178 30.074,27.774 30.074,31.174 31.3,32.4 32.9,32.4 33.5,33 33.5,34.9 33.475,34.925 33.2,34.925 29.241,34.925 25.429,31.113 25.429,30.509 24.638,29.718 24.638,28.575 ; 35.56,27.36 35.6,27.4 36.965,26.035 41.275,26.035 43.016,27.776 43.016,29.12 42.418,29.718 36.322,29.718 35.56,28.956 35.56,27.36 ; 46.045,21.138 47.087,20.096 51.846,20.096 52.324,20.574 52.324,22.003 51.9,22.427 51.9,25.1 52.324,25.524 52.324,26.289 51.181,27.432 48.641,27.432 48.006,28.067 47.117,28.067 46.045,26.995 46.045,21.138
Int4 (PWR) (plane layer: these items are gaps in the copper):
  pour cut-out: -0.381,18.897 11.916,18.902 11.916,14.627 11.916,13.357 11.916,12.827 11.916,12.573 11.916,11 -0.381,11
  region: 58.404,22.328 56.404,22.328 56.404,19.328 58.404,19.328
  region: 57.277,30.48 57.277,24.556 65.024,24.556 65.024,25.908 65.024,30.353
  pour cut-out: 51.943,30.099 51.943,35.306 69.85,35.306 69.85,30.226 69.977,30.099
  lines w0.4: 6.223,0 6.731,0 6.731,2.794 7.379,3.442 9.686,3.442 11.832,5.588 31.115,5.588 ; 31.145,5.618 36.035,5.618 38.896,5.618 40.543,5.618 45.974,11.049 45.974,13.97 47.498,15.494 47.944,15.94 47.944,18.956 45.339,21.561 45.339,22.225 44.196,23.368 42.732,23.368 37.4,28.7 27.4,28.7 26.1,30 26.1,32.2 26.1,32.333 26.667,32.9 28.702,32.9 30.101,31.501 30.096,31.496 36.068,31.496 38.608,31.496 43.87,26.234 46.029,26.234 49.657,22.606 ; 45.974,-0.064 45.974,3.302 49.705,7.033 58.341,7.033 60.706,9.398 60.706,10.922 60.706,11.557 58.293,11.557 57.15,10.414 51.943,10.414 50.884,10.414 50.884,12.149 50.884,15.324 50.884,20.438 49.657,21.665 ; 38.1,12.5 37.5,11.9 36.1,11.9 34.875,13.125 34.875,13.911 35.886,14.922 35.9,14.922 35.9,15.844 34.771,16.972 34.771,18.759 32.8,20.73 32.8,23.114 35.814,23.114 36.703,23.114 38.1,21.717 38.862,20.955 38.862,15.656 38.862,14.478 38.132,13.748 38.1,13.716 38.1,12.5 ; 38.1,12.5 38.1,12.5 ; 49.657,21.665 49.657,21.717 49.657,22.606 ; 49.657,21.665 49.657,22.606 ; 0.254,19.05 8.972,19.05 9.381,19.459 10.061,19.459 10.541,19.939 17.907,27.305 19.295,27.305 29.972,16.628 29.972,13.589 30.988,12.573 32.258,12.573 32.585,12.9 32.585,17.453 20.066,29.972 16.891,29.972 8.89,21.971 2.032,21.971 0.635,21.971 0.254,21.59 0.254,19.05 ; 53.975,16.383 53.975,19.149 59.406,19.149 64.133,23.876 64.897,23.876 65.151,23.622 65.151,21.082 60.213,16.144 57.658,13.589 56.769,13.589 53.975,16.383

## Silkscreen, mask and mechanical layers (free items; w line width, h text height)
Top Overlay:
  drawing of 108 lines, arcs and shapes, not listed
  text "out" at 44.8,34.4 h0.6
  text "in" at 42.2,34.3 h0.6
  text "1" at 39.266,30.122 h1
  text "linkit-smd-v4.2" at 10.5,7.7 h2
  text "Reed switch" at 8.001,4.826 h1
  text "UART GPS" at 25.72,3.02 h0.8
  text "-" at 56.4,0.1 h0.8
  text "-" at 62.3,0.1 h0.8
  text "+" at 59.154,0.087 h1
  text "+" at 53.158,0.021 h1
Bottom Overlay:
  circle w0.254: c37.973,16.51 r0.115
  lines w0.15: 51.96,34.486 51.96,30.094 56.731,30.094 ; 65.189,30.094 67.308,30.094 ; 67.624,30.094 68.578,30.094 ; 68.894,30.094 69.925,30.094
  text "SAT UART" at 21.38,32.92 h0.8
  text "-" at 45.054,0.192 h1.52
  text "+" at 49.654,0.2 h1.52
Bottom Paste:
  rectangle: 3.4,13.852 4.126,14.902
Mechanical 3:
  drawing of 298 lines, arcs and shapes, not listed
  text "Layer" at 4.036,90.17 h1.52
  text "Name" at 10.405,90.17 h1.52
  text "Material" at 26.639,90.17 h1.52
  text "Thickness" at 38.656,90.17 h1.52
  text "Constant" at 47.743,90.17 h1.52
  text "Board Layer Stack" at 56.157,90.17 h1.52
  text "Top Overlay" at 10.405,87.122 h1.52
  text "Top Solder" at 10.405,84.074 h1.52
  text "SM-003" at 26.639,84.074 h1.52
  text "0.025mm" at 38.656,84.074 h1.52
  text "4" at 47.743,84.074 h1.52
  text "Top Surface Finish" at 10.405,81.026 h1.52
  text "Nickel, Gold" at 26.639,81.026 h1.52
  text "0.004mm" at 38.656,81.026 h1.52
  text "1" at 4.036,77.978 h1.52
  text "Top Layer" at 10.405,77.978 h1.52
  text "CF-004" at 26.639,77.978 h1.52
  text "0.035mm" at 38.656,77.978 h1.52
  text "Dielectric 1" at 10.405,74.93 h1.52
  text "PP-015" at 26.639,74.93 h1.52
  text "0.101mm" at 38.656,74.93 h1.52
  text "4.3" at 47.743,74.93 h1.52
  text "2" at 4.034,71.882 h1.52
  text "Int1 (GND)" at 10.405,71.882 h1.52
  text "CF-004" at 26.639,71.882 h1.52
  text "0.018mm" at 38.656,71.882 h1.52
  text "Dielectric 2" at 10.405,68.834 h1.52
  text "PP-006" at 26.639,68.834 h1.52
  text "0.071mm" at 38.656,68.834 h1.52
  text "4.1" at 47.743,68.834 h1.52
  text "3" at 4.036,65.786 h1.52
  text "Int2 (Sign)" at 10.405,65.786 h1.52
  text "CF-004" at 26.639,65.786 h1.52
  text "0.035mm" at 38.656,65.786 h1.52
  text "Dielectric 3" at 10.405,62.738 h1.52
  text "Core-001-HCC" at 26.639,62.738 h1.52
  text "1.130mm" at 38.656,62.738 h1.52
  text "4.25" at 47.743,62.738 h1.52
  text "4" at 4.036,59.69 h1.52
  text "Int3 (Sign)" at 10.405,59.69 h1.52
  text "CF-004" at 26.639,59.69 h1.52
  text "0.035mm" at 38.656,59.69 h1.52
  text "Dielectric 4" at 10.405,56.642 h1.52
  text "PP-006" at 26.639,56.642 h1.52
  text "0.071mm" at 38.656,56.642 h1.52
  text "4.1" at 47.743,56.642 h1.52
  text "5" at 4.036,53.594 h1.52
  text "Int4 (PWR)" at 10.405,53.594 h1.52
  text "CF-004" at 26.639,53.594 h1.52
  text "0.018mm" at 38.656,53.594 h1.52
  text "Dielectric 5" at 10.405,50.546 h1.52
  text "PP-015" at 26.639,50.546 h1.52
  text "0.101mm" at 38.656,50.546 h1.52
  text "4.3" at 47.743,50.546 h1.52
  text "6" at 4.036,47.498 h1.52
  text "Bottom Layer" at 10.405,47.498 h1.52
  text "CF-004" at 26.639,47.498 h1.52
  text "0.035mm" at 38.656,47.498 h1.52
  text "Bottom Surface Finish" at 10.405,44.45 h1.52
  text "Nickel, Gold" at 26.639,44.45 h1.52
  text "0.004mm" at 38.656,44.45 h1.52
  text "Bottom Solder" at 10.405,41.402 h1.52
  text "SM-003" at 26.639,41.402 h1.52
  text "0.025mm" at 38.656,41.402 h1.52
  text "4" at 47.743,41.402 h1.52
  text "Bottom Overlay" at 10.405,38.354 h1.52
Mechanical 8:
  lines w0.254: 4.826,-0.762 40.326,-0.762 40.326,34.738 4.826,34.738 4.826,-0.762
Mechanical 12:
  lines w0.1: 0,3.301 0,3.126 ccw(c3.15,3.151) 3.125,0 66.875,0 ccw(c66.85,3.15) 70,3.125 70,6.425 70,31.875 ccw(c66.85,31.85) 66.875,35.001 ; 0,3.302 0,31.875 cw(c3.15,31.85) 3.125,35.001 ; 3.125,35 66.875,35
Drill Drawing:
  drawing of 190 lines, arcs and shapes, not listed
  text "Symbol" at 83.197,95.252 h1.83
  text "Count" at 89.318,95.252 h1.83
  text "Hole Size" at 94.642,95.252 h1.83
  text "Plated" at 106.195,95.252 h1.83
  text "Hole Type" at 111.616,95.252 h1.83
  text "Drill Layer Pair" at 119.354,95.252 h1.83
  text "Via/Pad" at 133.689,95.252 h1.83
  text "Pad Shape" at 140.089,95.252 h1.83
  text "Template" at 148.345,95.252 h1.83
  text "Description" at 164.22,95.252 h1.83
  text "Hole Tolerance (+)" at 172.511,95.252 h1.83
  text "Hole Tolerance (-)" at 185.189,95.252 h1.83
  text "Hole Length" at 197.534,95.252 h1.83
  text "Routed Path Length" at 209.002,95.252 h1.83
  text "1" at 89.318,92.144 h1.52
  text "0.762mm (30.00mil)" at 94.642,92.144 h1.52
  text "PTH" at 106.195,92.144 h1.52
  text "Round" at 111.616,92.144 h1.52
  text "Top Layer - Bottom Layer" at 119.354,92.144 h1.52
  text "Pad" at 133.689,92.144 h1.52
  text "Rounded" at 140.089,92.144 h1.52
  text "c152h76m0mx0" at 148.345,92.144 h1.52
  text "-" at 197.534,92.144 h1.52
  text "-" at 209.002,92.144 h1.52
  text "A" at 82.562,91.891 h1.38
  text "1" at 89.318,89.036 h1.52
  text "0.762mm (30.00mil)" at 94.642,89.036 h1.52
  text "PTH" at 106.195,89.036 h1.52
  text "Square" at 111.616,89.036 h1.52
  text "Top Layer - Bottom Layer" at 119.354,89.036 h1.52
  text "Pad" at 133.689,89.036 h1.52
  text "Rectangle" at 140.089,89.036 h1.52
  text "s152h76m0mx0" at 148.345,89.036 h1.52
  text "-" at 197.534,89.036 h1.52
  text "-" at 209.002,89.036 h1.52
  text "1" at 89.318,85.928 h1.52
  text "2.000mm (78.74mil)" at 94.642,85.928 h1.52
  text "NPTH" at 106.195,85.928 h1.52
  text "Round" at 111.616,85.928 h1.52
  text "Top Layer - Bottom Layer" at 119.354,85.928 h1.52
  text "Pad" at 133.689,85.928 h1.52
  text "Rounded" at 140.089,85.928 h1.52
  text "c200hn200m200" at 148.345,85.928 h1.52
  text "-" at 197.534,85.928 h1.52
  text "-" at 209.002,85.928 h1.52
  text "2" at 89.318,82.82 h1.52
  text "0.600mm (23.62mil)" at 94.642,82.82 h1.52
  text "PTH" at 106.195,82.82 h1.52
  text "Round" at 111.616,82.82 h1.52
  text "Top Layer - Bottom Layer" at 119.354,82.82 h1.52
  text "Pad" at 133.689,82.82 h1.52
  text "(Mixed)" at 140.089,82.82 h1.52
  text "(Mixed)" at 148.345,82.82 h1.52
  text "-" at 197.534,82.82 h1.52
  text "-" at 209.002,82.82 h1.52
  text "2" at 89.318,79.712 h1.52
  text "0.600mm (23.62mil)" at 94.642,79.712 h1.52
  text "PTH" at 106.195,79.712 h1.52
  text "Slot" at 111.616,79.712 h1.52
  text "Top Layer - Bottom Layer" at 119.354,79.712 h1.52
  text "Pad" at 133.689,79.712 h1.52
  text "Rounded" at 140.089,79.712 h1.52
  text "r180_100h60_140r50m0mx0" at 148.345,79.712 h1.52
  text "1.400mm (55.12mil)" at 197.534,79.712 h1.52
  text "0.800mm (31.50mil)" at 209.002,79.712 h1.52
  text "2" at 89.318,76.604 h1.52
  text "0.600mm (23.62mil)" at 94.642,76.604 h1.52
  text "PTH" at 106.195,76.604 h1.52
  text "Slot" at 111.616,76.604 h1.52
  text "Top Layer - Bottom Layer" at 119.354,76.604 h1.52
  text "Pad" at 133.689,76.604 h1.52
  text "Rounded" at 140.089,76.604 h1.52
  text "r220_100h60_180r50m0mx0" at 148.345,76.604 h1.52
  text "1.800mm (70.87mil)" at 197.534,76.604 h1.52
  text "1.200mm (47.24mil)" at 209.002,76.604 h1.52
  text "2" at 89.318,73.496 h1.52
  text "0.620mm (24.41mil)" at 94.642,73.496 h1.52
  text "NPTH" at 106.195,73.496 h1.52
  text "Round" at 111.616,73.496 h1.52
  text "Top Layer - Bottom Layer" at 119.354,73.496 h1.52
  text "Pad" at 133.689,73.496 h1.52
  text "Rounded" at 140.089,73.496 h1.52
  text "c62hn62m42p0" at 148.345,73.496 h1.52
  text "-" at 197.534,73.496 h1.52
  text "-" at 209.002,73.496 h1.52
  text "3" at 89.318,70.388 h1.52
  text "0.300mm (11.81mil)" at 94.642,70.388 h1.52
  text "PTH" at 106.195,70.388 h1.52
  text "Round" at 111.616,70.388 h1.52
  text "Top Layer - Bottom Layer" at 119.354,70.388 h1.52
  text "Via" at 133.689,70.388 h1.52
  text "Rounded" at 140.089,70.388 h1.52
  text "v60h30m0mx0" at 148.345,70.388 h1.52
  text "-" at 197.534,70.388 h1.52
  text "-" at 209.002,70.388 h1.52
  text "3" at 89.318,67.28 h1.52
  text "2.200mm (86.61mil)" at 94.642,67.28 h1.52
  text "PTH" at 106.195,67.28 h1.52
  text "Round" at 111.616,67.28 h1.52
  text "Top Layer - Bottom Layer" at 119.354,67.28 h1.52
  text "Pad" at 133.689,67.28 h1.52
  text "Rounded" at 140.089,67.28 h1.52
  text "c550h220m0mx0" at 148.345,67.28 h1.52
  text "-" at 197.534,67.28 h1.52
  text "-" at 209.002,67.28 h1.52
  text "4" at 89.318,64.172 h1.52
  text "0.100mm (3.94mil)" at 94.642,64.172 h1.52
  text "PTH" at 106.195,64.172 h1.52
  text "Round" at 111.616,64.172 h1.52
  text "Top Layer - Bottom Layer" at 119.354,64.172 h1.52
  text "Via" at 133.689,64.172 h1.52
  text "Rounded" at 140.089,64.172 h1.52
  text "(Mixed)" at 148.345,64.172 h1.52
  text "-" at 197.534,64.172 h1.52
  text "-" at 209.002,64.172 h1.52
  text "4" at 89.318,61.064 h1.52
  text "0.100mm (3.94mil)" at 94.642,61.064 h1.52
  text "PTH" at 106.195,61.064 h1.52
  text "Round" at 111.616,61.064 h1.52
  text "Top Layer - Bottom Layer" at 119.354,61.064 h1.52
  text "Via" at 133.689,61.064 h1.52
  text "Rounded" at 140.089,61.064 h1.52
  text "(Mixed)" at 148.345,61.064 h1.52
  text "-" at 197.534,61.064 h1.52
  text "-" at 209.002,61.064 h1.52
  text "5" at 89.318,57.956 h1.52
  text "0.150mm (5.91mil)" at 94.642,57.956 h1.52
  text "PTH" at 106.195,57.956 h1.52
  text "Round" at 111.616,57.956 h1.52
  text "Top Layer - Bottom Layer" at 119.354,57.956 h1.52
  text "Via" at 133.689,57.956 h1.52
  text "Rounded" at 140.089,57.956 h1.52
  text "v30h15m0mx0" at 148.345,57.956 h1.52
  text "-" at 197.534,57.956 h1.52
  text "-" at 209.002,57.956 h1.52
  text "6" at 89.318,54.848 h1.52
  text "0.500mm (19.69mil)" at 94.642,54.848 h1.52
  text "PTH" at 106.195,54.848 h1.52
  text "Round" at 111.616,54.848 h1.52
  text "Top Layer - Bottom Layer" at 119.354,54.848 h1.52
  text "Pad" at 133.689,54.848 h1.52
  text "Rounded" at 140.089,54.848 h1.52
  text "c75h50m0mx0" at 148.345,54.848 h1.52
  text "-" at 197.534,54.848 h1.52
  text "-" at 209.002,54.848 h1.52
  text "6" at 89.318,51.74 h1.52
  text "0.991mm (39.02mil)" at 94.642,51.74 h1.52
  text "NPTH" at 106.195,51.74 h1.52
  text "Round" at 111.616,51.74 h1.52
  text "Top Layer - Bottom Layer" at 119.354,51.74 h1.52
  text "Pad" at 133.689,51.74 h1.52
  text "Rounded" at 140.089,51.74 h1.52
  text "c65hn99m0mx0" at 148.345,51.74 h1.52
  text "-" at 197.534,51.74 h1.52
  text "-" at 209.002,51.74 h1.52
  text "8" at 89.318,48.631 h1.52
  text "1.000mm (39.37mil)" at 94.642,48.631 h1.52
  text "PTH" at 106.195,48.631 h1.52
  text "Round" at 111.616,48.631 h1.52
  text "Top Layer - Bottom Layer" at 119.354,48.631 h1.52
  text "Pad" at 133.689,48.631 h1.52
  text "(Mixed)" at 140.089,48.631 h1.52
  text "(Mixed)" at 148.345,48.631 h1.52
  text "-" at 197.534,48.631 h1.52
  text "-" at 209.002,48.631 h1.52
  text "46" at 89.318,45.523 h1.52
  text "0.200mm (7.87mil)" at 94.642,45.523 h1.52
  text "PTH" at 106.195,45.523 h1.52
  text "Round" at 111.616,45.523 h1.52
  text "Top Layer - Bottom Layer" at 119.354,45.523 h1.52
  text "Via" at 133.689,45.523 h1.52
  text "Rounded" at 140.089,45.523 h1.52
  text "(Mixed)" at 148.345,45.523 h1.52
  text "-" at 197.534,45.523 h1.52
  text "-" at 209.002,45.523 h1.52
  text "Slot definitions :" at 83.197,43.348 h1.52
  text "Routed Path Length" at 91.758,43.348 h1.52
  text "= Calculated from tool start centre position to tool end centre position." at 102.323,43.348 h1.52
  text "Hole Length" at 91.758,42.105 h1.52
  text "= Routed Path Length + Tool Size = Slot length as defined in the PCB layout" at 98.467,42.105 h1.52

## Text inside footprints (layer, text, board x,y; h text height)
J13: Mechanical 10 "Edge of PCB" at -0.825,12.351 h0.8 r270